# Altium PCB RP2040.PcbDoc
Units mm, origin at the board's own origin, x right, y up, seen from the top; angles counter-clockwise.
Board outline 50 x 50 mm, 2 copper layers (Top Layer, Bottom Layer), stack 1.569 mm thick; 33 components, 52 nets, 211 pads, 20 vias.
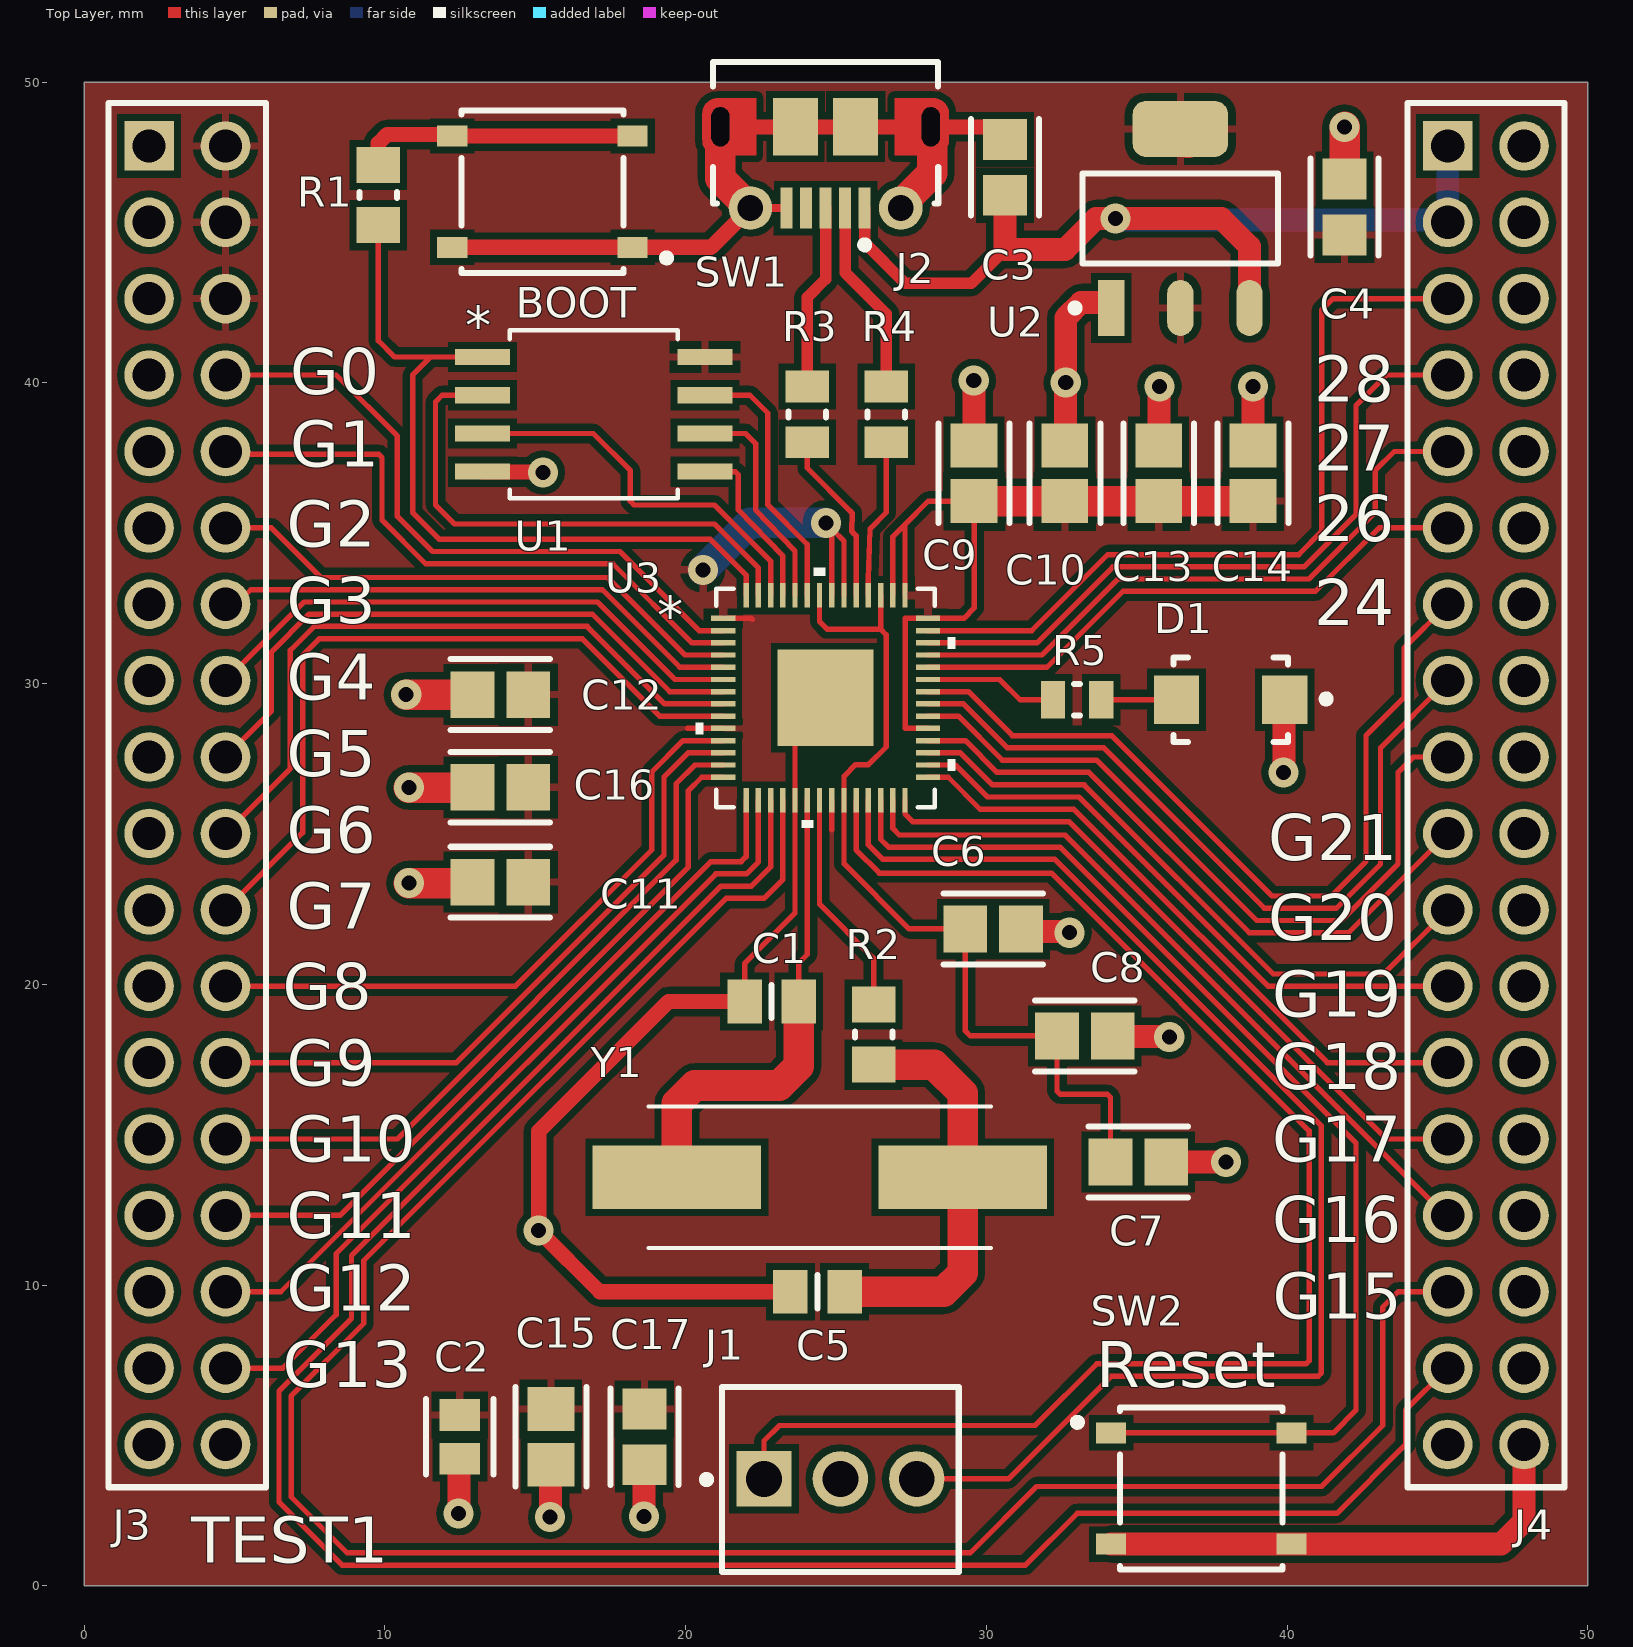
[diagram p0: Top Layer view]
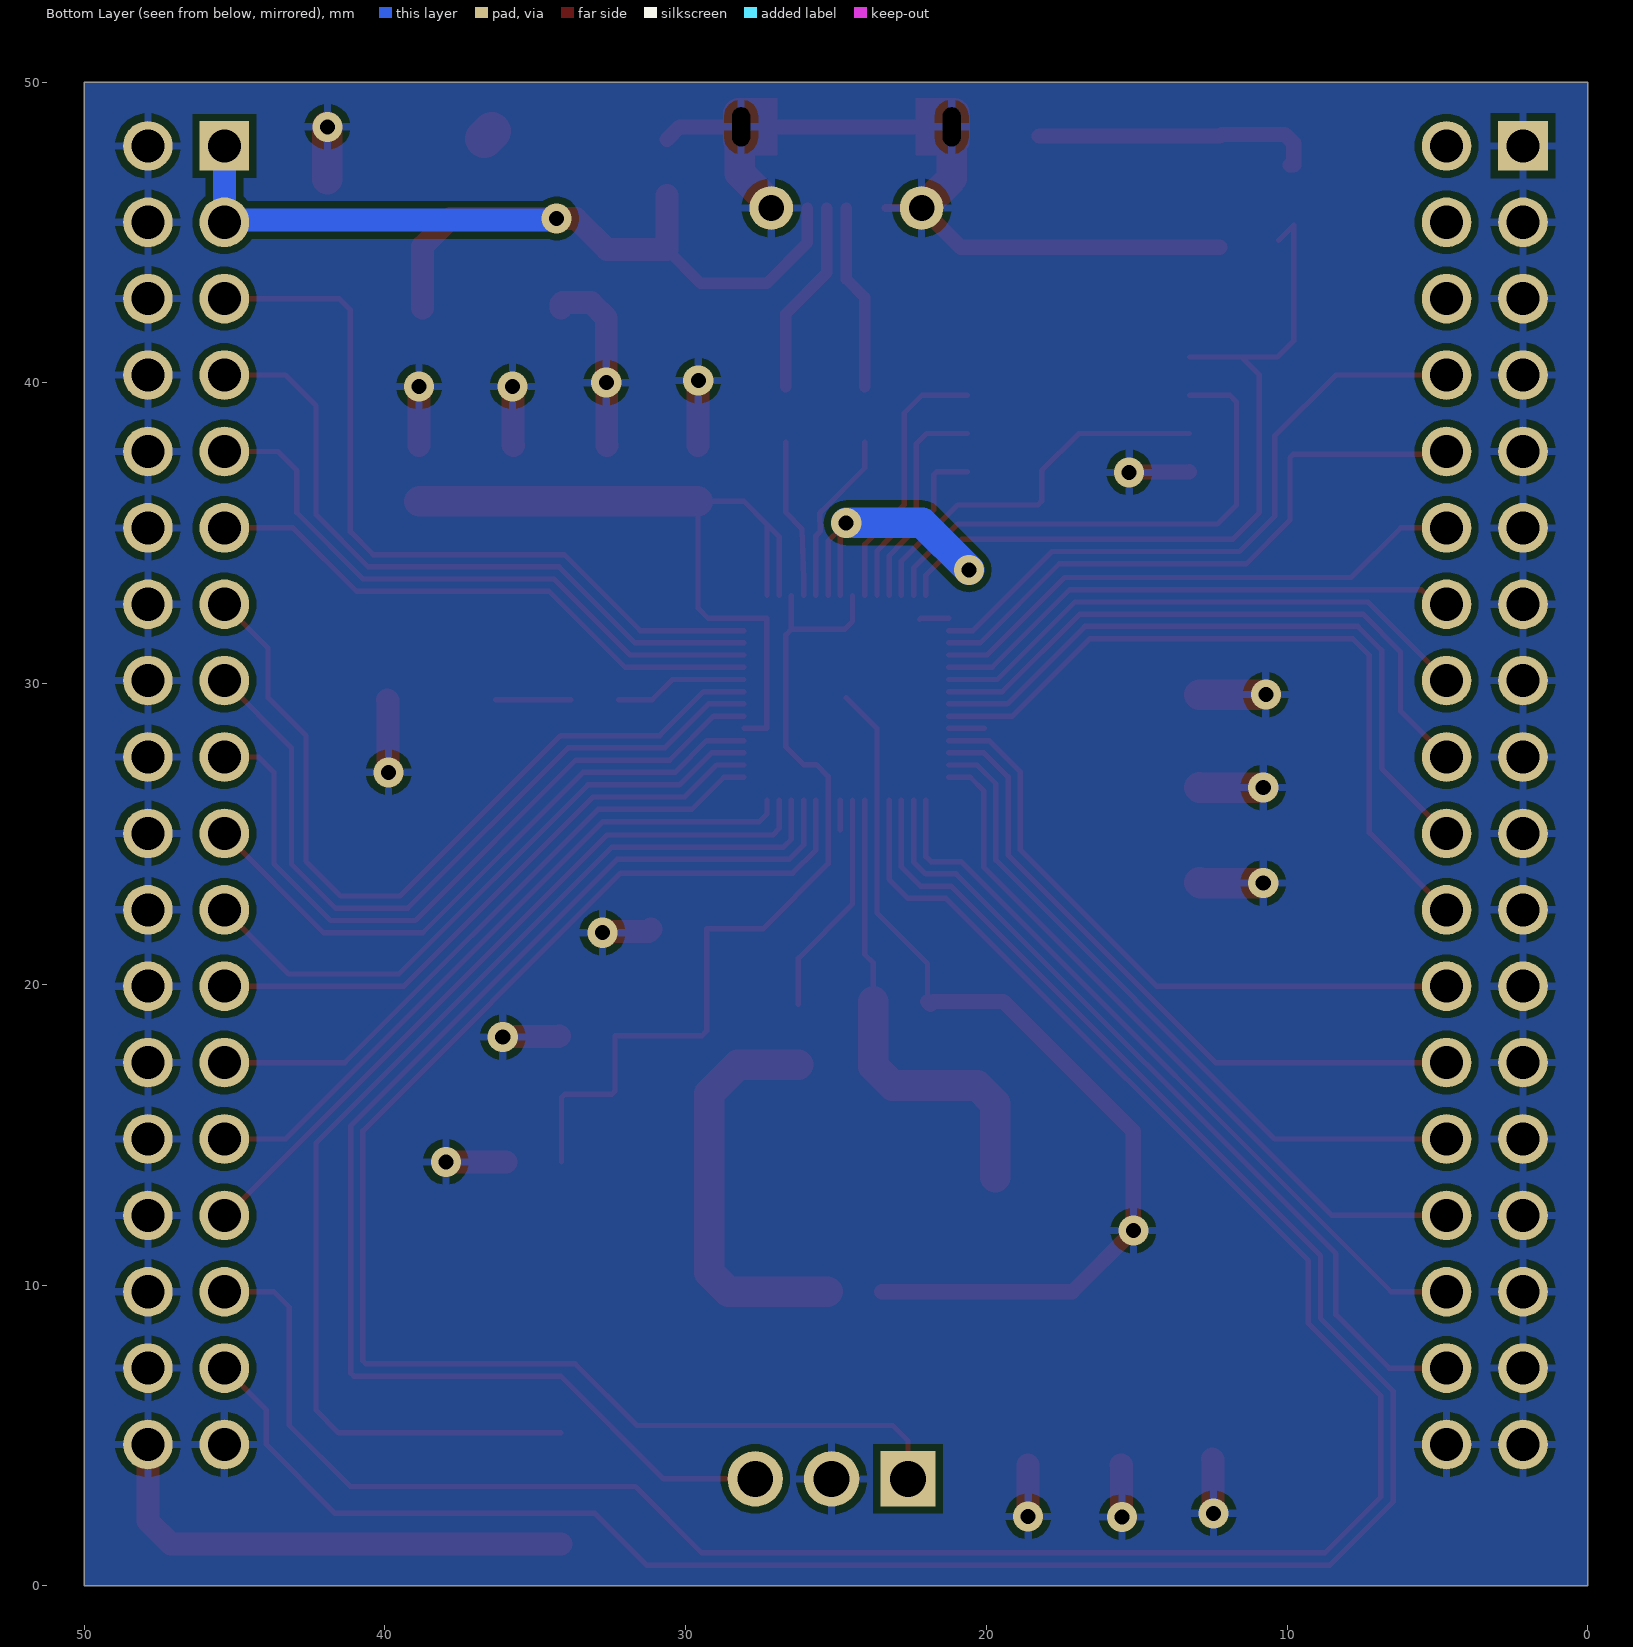
[diagram p1: Bottom Layer view, seen from below]
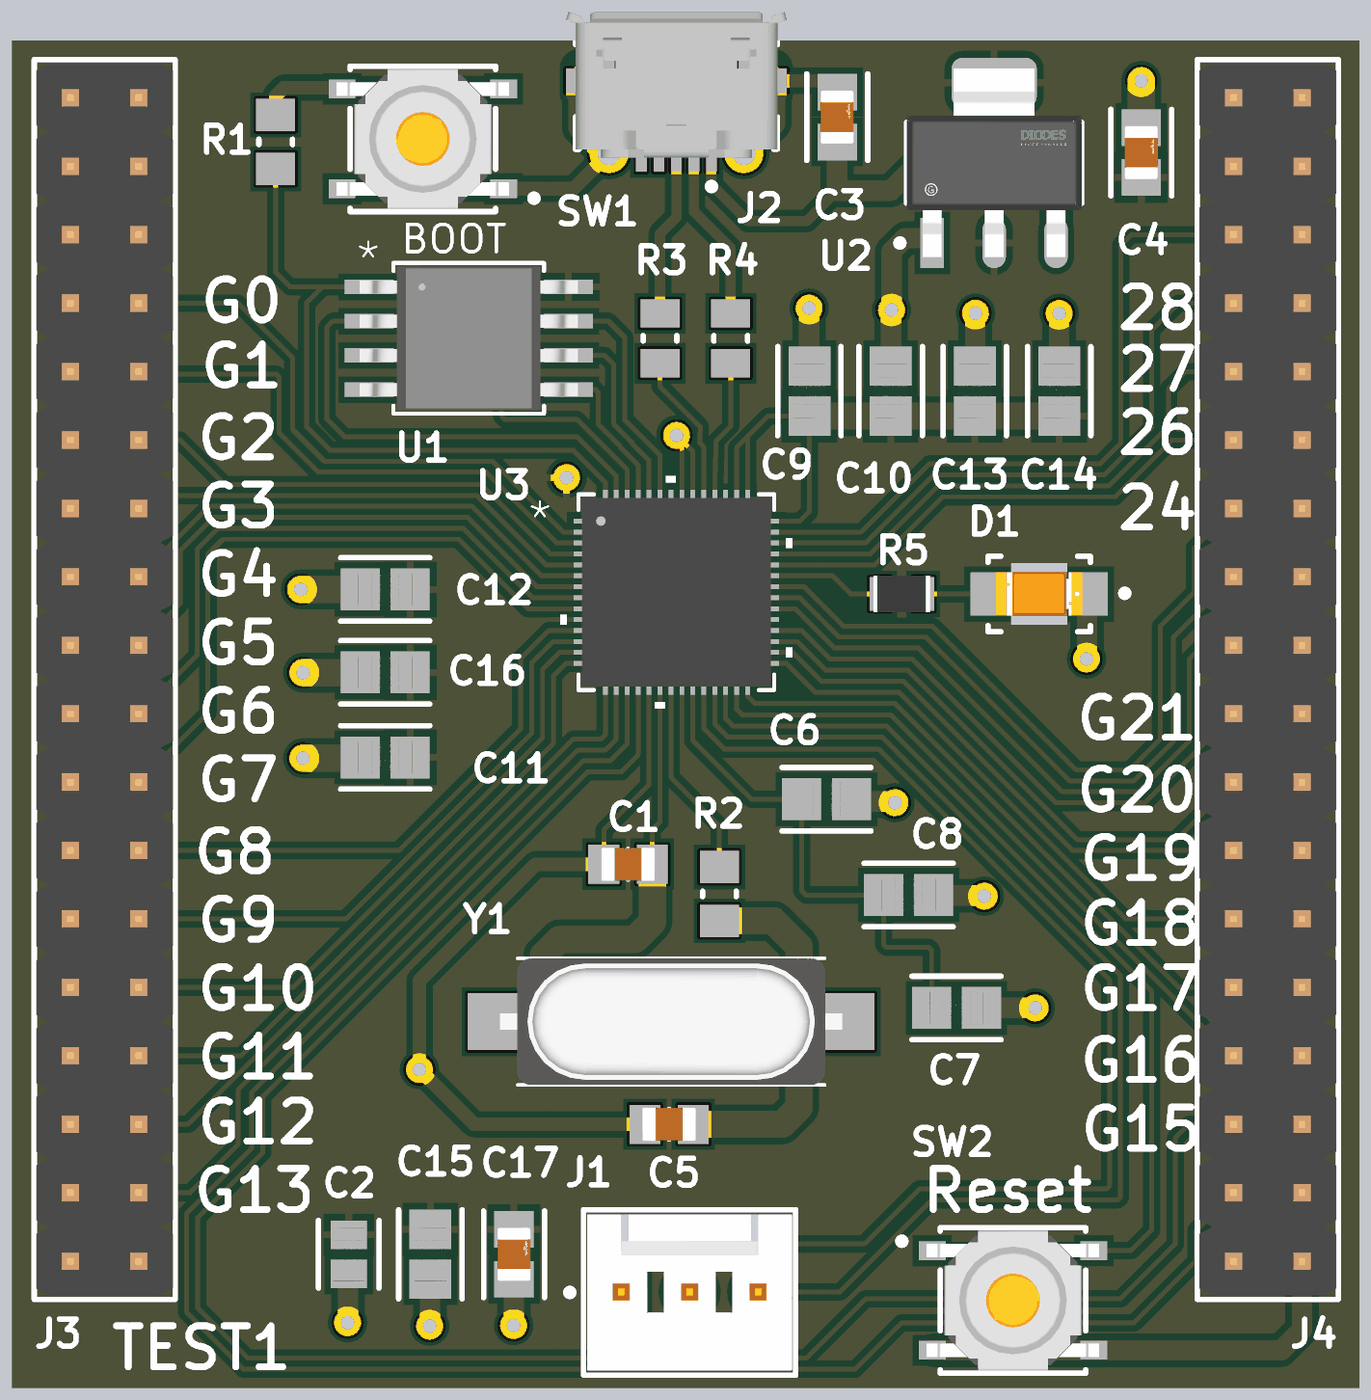
[diagram p2: 3D render of the assembled board from above, using the file's embedded part models]

## Layer stack, top to bottom
Top Solder: solder mask 0.0254, SM-001, Dk 4
Top Layer: signal copper 0.035
Dielectric 1: core 1.4986, Core-043, Dk 4.3
Bottom Layer: signal copper 0.035
Bottom Solder: solder mask 0.0254, SM-001, Dk 4

## Board outline
0,0 50,0 50,50 0,50

## Design rules (kind name [scope] priority, off if disabled: settings)
Clearance [All] p1: gap=0.229 ignorepadtopadclearanceinfootprint=FALSE
MinimumSolderMaskSliver [All] p1: minsoldermaskwidth=0.216
PolygonConnect [All] p1: connectstyle=Relief reliefconductorwidth=0.254 reliefentries=4 polygonreliefangle="90 Angle" airgapwidth=0.254
RoutingVias [All] p1: holewidth=0.3 width=0.6 viastyle="Through Hole" minholewidth=0.2 minwidth=0.2 maxholewidth=1.6 maxwidth=1.6
SilkToSolderMaskClearance [IsPad] p1: minsilkscreentomaskgap=0.178 clearancetoexposedcopper=TRUE
SolderMaskExpansion [All] p1: expansion=0.102 istentingtop=FALSE
Width [All] p1: maxlimit=2.54 minlimit=0.025 preferedwidth=0.254 minimp=50.000000 maximp=50.000000 favimp=50.000000
28 further rules are at their usual default settings.

## Components (designator, comment, footprint, x,y, rotation, side; value= is the part's Value field where it differs from the comment)
C1 "CL21C270JCANNNC" CAPC2012X140N 22.86,19.431 r180 top
C2 "CL21B104KBCNNNC" FP-CL21-IPC_C 12.49,4.953 r270 top
C3 "GRM21BR61C106KE15K" FP-GRM21B-0_1-IPC_A 30.623,47.164 r90 top
C4 "GRM21BR61C106KE15K" FP-GRM21B-0_1-IPC_A 41.91,45.847 r90 top
C5 "CL21C270JCANNNC" CAPC2012X140N 24.384,9.779 r180 top
C6 "CL21B105KOFNNNE" FP-CL21-IPC_A 30.226,21.844 r180 top
C7 "CL21B104KBCNNNC" FP-CL21-IPC_A 35.052,14.097 r0 top
C8 "CL21B104KBCNNNC" FP-CL21-IPC_A 33.274,18.288 r0 top
C9 "CL21B105KOFNNNE" FP-CL21-IPC_A 29.591,36.994 r270 top
C10 "CL21B104KBCNNNC" FP-CL21-IPC_A 32.608,36.994 r90 top
C11 "CL21B104KBCNNNC" FP-CL21-IPC_A 13.843,23.398 r180 top
C12 "CL21B104KBCNNNC" FP-CL21-IPC_A 13.843,29.633 r180 top
C13 "CL21B104KBCNNNC" FP-CL21-IPC_A 35.73,36.994 r90 top
C14 "CL21B104KBCNNNC" FP-CL21-IPC_A 38.862,36.994 r90 top
C15 "CL21B104KBCNNNC" FP-CL21-IPC_A 15.521,4.953 r270 top
C16 "CL21B104KBCNNNC" FP-CL21-IPC_A 13.843,26.554 r180 top
C17 "GRM21BR61C106KE15K" FP-GRM21B-0_1-IPC_A 18.626,4.953 r90 top
D1 "APTR3216SECK" FP-APTR3216SECK-MFG 38.122,29.464 r180 top
J1 "22-29-2031" FP-22-29-2031-MFG 25.146,3.536 r0 top
J2 "105017-0001" USB-MICRO-B_V 24.654,47.164 r180 top
J3 "61303621121" 61303621121 3.429,26.289 r270 top
J4 "61303621121" 61303621121 46.609,26.289 r270 top
R1 "RC0805JR-131KL" RESC2013X60X35ML10T20 9.779,46.244 r90 top value=1kR
R2 "RC0805JR-131KL" RESC2013X60X35ML10T20 26.251,18.331 r270 top
R3 "RK73H2ATTD27R4F" RESC2013X60X30NL20T20 24.044,38.953 r270 top value=27.4R
R4 "RK73H2ATTD27R4F" RESC2013X60X30NL20T20 26.67,38.953 r270 top value=27R4
R5 "RC0805FR-07470RL" RESC2013X60X35LL10T20 33.02,29.464 r0 top
SW1 "PTS526SK15SMTR2LFS" FP-PTS526SK15SMTR2LFS-MFG 15.24,46.355 r180 top
SW2 "PTS526SK15SMTR2LFS" FP-PTS526SK15SMTR2LFS-MFG 37.148,3.238 r0 top
U1 "W25Q128JVSIQ" W25Q128JVSIQ 16.944,38.953 r0 top
U2 "AZ1117IH-3.3TRG1" FP-SOT223-IPC_B 36.449,45.466 r90 top
U3 "RP2040" RP2040 24.654,29.528 r0 top
Y1 "ABLS-12.000MHz-20-B-3-H-T" XTAL_ABLS-12.000MHz-20-B-3-H-T 24.46,13.589 r180 top

## Footprints (in the part's own frame and the unit in brackets; to place one, negate y for a bottom-side part, rotate by r counter-clockwise, add the part's x,y. Pads: shape width x height; smd on the part's side, far side on the other; paste and mask are expansions set on the pad)
61303621121 [mm] "Pin Header, pitch 2.54 mm, THT, Vertical, dual row, 36p"
  rect 1.65x1.65 hole 1.1: 1(-21.59,-1.27)
  round 1.65 hole 1.1: 2(-21.59,1.27) 3(-19.05,-1.27) 4(-19.05,1.27) 5(-16.51,-1.27) 6(-16.51,1.27) 7(-13.97,-1.27) 8(-13.97,1.27) 9(-11.43,-1.27) 10(-11.43,1.27) 11(-8.89,-1.27) 12(-8.89,1.27) 13(-6.35,-1.27) 14(-6.35,1.27) 15(-3.81,-1.27) 16(-3.81,1.27) 17(-1.27,-1.27) 18(-1.27,1.27) 19(1.27,-1.27) 20(1.27,1.27) 21(3.81,-1.27) 22(3.81,1.27) 23(6.35,-1.27) 24(6.35,1.27) 25(8.89,-1.27) 26(8.89,1.27) 27(11.43,-1.27) 28(11.43,1.27) 29(13.97,-1.27) 30(13.97,1.27) 31(16.51,-1.27) 32(16.51,1.27) 33(19.05,-1.27) 34(19.05,1.27) 35(21.59,-1.27) 36(21.59,1.27)
  silkscreen extent -23.01,-2.62 23.01,2.62, body extent -22.86,-2.54 22.86,2.54, height 8.59
CAPC2012X140N [mm]
  rect 1.15x1.45 smd: 1(-0.9,0) 2(0.9,0)
  silkscreen extent 0,-0.55 0,0.55, body extent -1,-0.63 1,0.63, height 0.75
FP-22-29-2031-MFG [mm]
  rect 1.84x1.84 hole 1.19 paste-1000 mask+0: 1(-2.54,0.02)
  round 1.84 hole 1.19 paste-1000 mask+0: 2(0,0.02) 3(2.54,0.02)
  silkscreen extent -4.57,-3.08 3.94,3.08, body extent -4.04,-3.17 4.04,3.17, height 0.25
FP-APTR3216SECK-MFG [mm]
  rect 1.5x1.6 smd paste+0 mask+0: 1(-1.8,0) 2(1.8,0)
  silkscreen extent -3.3,-1.4 1.9,1.4, body extent -2.65,-1.15 2.65,1.15, height 0.25
FP-CL21-IPC_A [mm]
  rect 1.455x1.556 smd paste+0 mask+0: 1(-0.926,0) 2(0.926,0)
  silkscreen extent -1.65,-1.18 1.65,1.18, body extent -2.15,-1.28 2.15,1.28, height 0.25
FP-CL21-IPC_C [mm]
  rect 1.055x1.356 smd paste+0 mask+0: 1(-0.726,0) 2(0.726,0)
  silkscreen extent -1.25,-1.12 1.25,1.12, body extent -1.35,-0.82 1.35,0.82, height 0.25
FP-GRM21B-0_1-IPC_A [mm]
  rect 1.358x1.462 smd paste+0 mask+0: 1(-0.927,0) 2(0.927,0)
  silkscreen extent -1.61,-1.13 1.61,1.13, body extent -2.11,-1.23 2.11,1.23, height 0.25
FP-PTS526SK15SMTR2LFS-MFG [mm]
  rect 1x0.7 smd paste+0 mask+0: 1(-3,1.85) 2(3,1.85) 3(-3,-1.85) 4(3,-1.85)
  silkscreen extent -4.25,-2.7 2.7,2.7, body extent -3.6,-2.8 3.6,2.8, height 0.25
FP-SOT223-IPC_B [mm]
  rect 1.86x0.872 smd paste+0 mask+0: 1(-2.976,2.3)
  rrect100% 1.86x0.872 smd paste+0 mask+0: 2(-2.976,0) 3(-2.976,-2.3)
  rrect47% 1.86x3.172 smd paste+0 mask+0: 4(2.976,0)
  silkscreen extent -3.1,-3.25 1.5,3.62, body extent -4.16,-3.5 4.16,3.5, height 0.25
RESC2013X60X30NL20T20 [mm] "Chip Resistor, 2-Leads, Body 2.00x1.25mm, IPC Medium Density"
  rect 1.05x1.45 smd: 1(-0.925,0) 2(0.925,0)
  silkscreen extent -0.1,-0.63 0.1,0.63, body extent -1.1,-0.72 1.1,0.72, height 0.6
RESC2013X60X35LL10T20 [mm] "Chip Resistor, 2-Leads, Body 2.1x1.35mm, IPC High Density"
  rect 0.8x1.25 smd: 1(-0.8,0) 2(0.8,0)
  silkscreen extent -0.1,-0.53 0.1,0.53, body extent -1.05,-0.67 1.05,0.68, height 0.6
RESC2013X60X35ML10T20 [mm] "Chip Resistor, 2-Leads, Body 2.00x1.25mm, IPC Low Density"
  rect 1.2x1.45 smd: 1(-1,0) 2(1,0)
  silkscreen extent -0.1,-0.63 0.1,0.63, body extent -1.05,-0.67 1.05,0.67, height 0.6
RP2040 [mil] "RP2040"
  rect 32x7 smd paste+0 mask+0: 1(-134,104) 2(-134,88) 3(-134,72) 4(-134,56) 5(-134,40) 6(-134,24) 7(-134,8) 8(-134,-8) 9(-134,-24) 10(-134,-40) 11(-134,-56) 12(-134,-72) 13(-134,-88) 14(-134,-104) 29(134,-104) 30(134,-88) 31(134,-72) 32(134,-56) 33(134,-40) 34(134,-24) 35(134,-8) 36(134,8) 37(134,24) 38(134,40) 39(134,56) 40(134,72) 41(134,88) 42(134,104)
  rect 7x32 smd paste+0 mask+0: 15(-104,-134) 16(-88,-134) 17(-72,-134) 18(-56,-134) 19(-40,-134) 20(-24,-134) 21(-8,-134) 22(8,-134) 23(24,-134) 24(40,-134) 25(56,-134) 26(72,-134) 27(88,-134) 28(104,-134) 43(104,134) 44(88,134) 45(72,134) 46(56,134) 47(40,134) 48(24,134) 49(8,134) 50(-8,134) 51(-24,134) 52(-40,134) 53(-56,134) 54(-72,134) 55(-88,134) 56(-104,134)
  rect 126x126 smd paste-62.5 mask+0: 57(0,0)
  silkscreen extent -170,-170 170,170, body extent -138,-138 138,138, height 35
USB-MICRO-B_V [mm] "USB, MICRO B, Body 7.491x4.695 mm, Pitch 0.65 mm"
  rect 0.4x1.35 smd: 1(-1.3,1.35) 2(-0.65,1.35) 3(0,1.35) 4(0.65,1.35) 5(1.3,1.35)
  round 1.45 hole 0.85: 6(-2.5,1.35) 7(2.5,1.35)
  rrect50% 0x0 hole 0.6 slot 1.3 at 90 deg: 8(-3.5,-1.35) 11(3.5,-1.35)
  rect 1.5x1.9 smd: 9(-1,-1.35) 10(1,-1.35)
  Top Layer circle w0.5: c3.6,-1.8 r0.25
  Top Layer circle w0.5: c-3.6,-1.8 r0.25
  Top Layer region: -2.3,-2.3 -2.3,-0.4 -3.6,-0.4 -3.6,-2.3
  Top Layer region: 2.3,-0.4 2.3,-2.3 3.6,-2.3 3.6,-0.4
  Top Layer region: 3.6,-0.9 3.6,-1.8 4.1,-1.8 4.1,-0.9
  Top Layer region: -3.6,-1.8 -3.6,-0.9 -4.1,-0.9 -4.1,-1.8
  Top Layer lines w0.5: 3.572,-0.652 cw(c3.6,-0.9) 3.572,-1.148 cw(c3.6,-0.9) 3.503,-1.13 cw(c3.6,-0.9) 3.35,-0.9 cw(c3.6,-0.9) 3.503,-0.67 cw(c3.6,-0.9) 3.572,-0.652 ; -3.54,-0.657 cw(c-3.6,-0.9) -3.54,-1.143 cw(c-3.6,-0.9) -3.85,-0.9 cw(c-3.6,-0.9) -3.54,-0.657
  silkscreen extent -3.75,-3.5 3.75,2.7, body extent -4.1,-3.9 4.1,1.5, height 2.67
W25Q128JVSIQ [mil] "W25Q128JVSIQ"
  rect 72x21 smd paste+0 mask+0: 1(-145.5,75) 2(-145.5,25) 3(-145.5,-25) 4(-145.5,-75) 5(145.5,-75) 6(145.5,-25) 7(145.5,25) 8(145.5,75)
  silkscreen extent -110,-110 110,110, body extent -159,-105 159,105, height 85
XTAL_ABLS-12.000MHz-20-B-3-H-T [mm]
  rect 5.6x2.1 smd: 1(-4.75,0) 2(4.75,0)
  silkscreen extent -5.7,-2.35 5.7,2.35, body extent -6.35,-2.35 6.35,2.35, height 4.06

## Part data
C1 C5: "CL21 Series 27 pF 100 V ±5 % Tolerance C0G SMT Multilayer Ceramic Capacitor", Capacitance=27pF, Case Code (Imperial)=0805, Case Code (Metric)=2012, Dielectric=C0G, Manufacturer=Samsung, Max Operating Temperature=125°C, Min Operating Temperature=-55°C, Package=None, Package Quantity=1, Supplier Part Number 1=1276-2622-1-ND, Temperature Coefficient=300ppm/°C, Tolerance=5%, Voltage=100V, Availability=Unavailable, Case/Package=0805, Category="Ceramic Capacitors", ComponentLink1Description=https://datasheet.ciiva.com/25740/cl21c270jcannnc-25740793.pdf?src-supplier=Digi-Key, ComponentLink1URL=https://datasheet.ciiva.com/25740/cl21c270jcannnc-25740793.pdf?src-supplier=Digi-Key, Construction=Flat, Depth=1.25mm, Height=0.65mm, Lead Free="Lead Free", Length=2mm, Manufacturer Part Number=CL21C270JCANNNC, Mount="Surface Mount", MP=CL21C270JCANNNC, Packaging="Tape and Reel", Price=None, Pricing 1="1=0.10000, 10=0.05700, 50=0.03100, 100=0.02520, 500=0.01802, 1000=0.01417 (USD)", Radiation Hardening=No, RoHS=Yes, RoHS Compliant=Yes, Series=CL, Stock 1=133925, Supplier 1=Digi-Key, Thickness=0.03inch, Voltage Rating=100V, Voltage Rating (DC)=100V, Width=0.049inch
C2 C7 C8 C10 C11 C12 C13 C14 C15 C16: library part CMP-2000-05017-2, "CL21 Series 0805 100nF 50V ±10% Tolerance X7R Multilayer Ceramic Chip Capacitor", Capacitance=100nF, Case Code (Imperial)=0805, Case Code (Metric)=2012, Dielectric=X7R, Manufacturer=Samsung, Max Operating Temperature=125°C, Min Operating Temperature=-55°C, Supplier Part Number 1=1276-1003-1-ND, Tolerance=10%, Voltage=50V, Case/Package=0805, Category="Ceramic Capacitors", ComponentLink1Description=https://datasheet.ciiva.com/25710/cl21b104kbcnnnc-25710182.pdf?src-supplier=Digi-Key, ComponentLink1URL=https://datasheet.ciiva.com/25710/cl21b104kbcnnnc-25710182.pdf?src-supplier=Digi-Key, ComponentLink2Description=https://datasheet.ciiva.com/29199/454152-da-01-en-vs-kondensator-0805-29199814.pdf?src-supplier=Conrad, ComponentLink2URL=https://datasheet.ciiva.com/29199/454152-da-01-en-vs-kondensator-0805-29199814.pdf?src-supplier=Conrad, Construction=Flat, Contact Plating=Tin, Depth=1.25mm, Height=0.85mm, Lead Free="Lead Free", Length=2mm, Manufacturer Part Number=CL21B104KBCNNNC, Material=Ceramic, Mount="Surface Mount", Packaging="Tape and Reel", Pricing 1="1=0.10000, 10=0.04400, 50=0.02400, 100=0.01960, 500=0.01404, 1000=0.01103 (USD)", Radiation Hardening=No, RoHS=Yes, RoHS Compliant=Yes, Series=CL, Stock 1=3609597, Supplier 1=Digi-Key, Thickness=0.037inch, Voltage Rating=50V, Voltage Rating (DC)=50V, Width=0.049inch
C3 C4 C17: library part CMP-2007-03534-2, "Chip Multilayer Ceramic Capacitors for General Purpose, 0805, 10uF, X5R, 15%, 10%, 16V", Capacitance=10uF, Case Code (Imperial)=0805, Case Code (Metric)=2012, Dielectric=X5R, Manufacturer=Murata, Max Operating Temperature=85°C, Min Operating Temperature=-55°C, Package Quantity=10000, Supplier Part Number 1=490-6473-1-ND, Tolerance=10%, Voltage=16V, Case/Package=0805, Category="Ceramic Capacitors", ComponentLink1Description=https://datasheet.ciiva.com/26822/getdatasheetpartid-31687-26822939.pdf?src-supplier=Verical, ComponentLink1URL=https://datasheet.ciiva.com/26822/getdatasheetpartid-31687-26822939.pdf?src-supplier=Verical, ComponentLink2Description=https://datasheet.ciiva.com/6270/partnumbering-e-01-6270410.pdf?src-supplier=Digi-Key, ComponentLink2URL=https://datasheet.ciiva.com/6270/partnumbering-e-01-6270410.pdf?src-supplier=Digi-Key, ComponentLink3Description=https://datasheet.ciiva.com/6270/partnumbering-e-01-6270407.pdf?src-supplier=Digi-Key, ComponentLink3URL=https://datasheet.ciiva.com/6270/partnumbering-e-01-6270407.pdf?src-supplier=Digi-Key, ComponentLink4Description=https://datasheet.ciiva.com/6270/partnumbering-e-01-6270412.pdf?src-supplier=Digi-Key, ComponentLink4URL=https://datasheet.ciiva.com/6270/partnumbering-e-01-6270412.pdf?src-supplier=Digi-Key, ComponentLink5Description=https://datasheet.ciiva.com/5414/product-5414934.pdf?src-supplier=Mouser, ComponentLink5URL=https://datasheet.ciiva.com/5414/product-5414934.pdf?src-supplier=Mouser, Construction=Flat, Depth=1.25mm, Height=1.25mm, Length=2mm, Manufacturer Part Number=GRM21BR61C106KE15K, Mount="Surface Mount", Packaging="Tape and Reel", Pricing 1="1=0.18000, 10=0.13100, 50=0.07420, 100=0.06150, 500=0.04312, 1000=0.03570, 2500=0.03323, 5000=0.03040 (USD)", Radiation Hardening=No, REACH SVHC="No SVHC", Reach SVHC Compliant=Yes, RoHS=Yes, RoHS Compliant=Yes, Series=GRM, Supplier 1=Digi-Key, Termination=SMD/SMT, Thickness=0.053inch, Voltage Rating=16V, Voltage Rating (DC)=16V, Width=0.049inch
  C3 C4: Stock 1=2364831
  C17: Stock 1=2364631
C6 C9: library part CMP-13271-003098-1, "CL21 Series 0805 1uF 16V ±10% Tolerance X7R Multilayer Ceramic Chip Capacitor", Capacitance=1uF, Case Code (Imperial)=0805, Case Code (Metric)=2012, Dielectric=X7R, Manufacturer=Samsung, Max Operating Temperature=125°C, Min Operating Temperature=-55°C, Package Quantity=1, Supplier Part Number 1=1276-1026-1-ND, Tolerance=10%, Voltage=16V, Case/Package=0805, Category="Ceramic Capacitors", ComponentLink1Description=https://datasheet.ciiva.com/25800/cl21b105kofnnne-25800257.pdf?src-supplier=Digi-Key, ComponentLink1URL=https://datasheet.ciiva.com/25800/cl21b105kofnnne-25800257.pdf?src-supplier=Digi-Key, ComponentLink2Description=https://datasheet.ciiva.com/26838/getdatasheetpartid-358361-26838673.pdf?src-supplier=Verical, ComponentLink2URL=https://datasheet.ciiva.com/26838/getdatasheetpartid-358361-26838673.pdf?src-supplier=Verical, ComponentLink3Description=https://datasheet.ciiva.com/26310/mlcc-catalogdownload2013-eng-26310166.pdf?src-supplier=Distrelec, ComponentLink3URL=https://datasheet.ciiva.com/26310/mlcc-catalogdownload2013-eng-26310166.pdf?src-supplier=Distrelec, Construction=Flat, Contact Plating=Tin, Depth=1.25mm, Height=1.25mm, Lead Free="Lead Free", Length=2mm, Manufacturer Part Number=CL21B105KOFNNNE, Mount="Surface Mount", Packaging="Tape and Reel", Pricing 1="1=0.10000, 10=0.05100, 50=0.02800, 100=0.02290, 500=0.01636, 1000=0.01286 (USD)", Radiation Hardening=No, RoHS=Yes, RoHS Compliant=Yes, Series=CL, Stock 1=664825, Supplier 1=Digi-Key, Thickness=0.053inch, Voltage Rating=16V, Voltage Rating (DC)=16V, Width=0.049inch
D1: library part CMP-44529-000069-1, "LED ORANGE CLEAR CHIP SMD", Case Code (Imperial)=1206, Case Code (Metric)=3216, Color=Orange, Forward Current=20mA, Forward Voltage=2.1V, Lens Color=Clear, Manufacturer=Kingbright, Max Operating Temperature=85°C, Min Operating Temperature=-40°C, Package Quantity=2000, Power Rating=75mW, Supplier Part Number 1=754-1170-2-ND, Case/Package=1206, Category=LEDs, ComponentLink1Description=https://datasheet.ciiva.com/2120/aptr3216seck-2120882.pdf?src-supplier=Digi-Key, ComponentLink1URL=https://datasheet.ciiva.com/2120/aptr3216seck-2120882.pdf?src-supplier=Digi-Key, ComponentLink2Description=https://datasheet.ciiva.com/12400/aptr3216seck-39406-12400858.pdf?src-supplier=Mouser, ComponentLink2URL=https://datasheet.ciiva.com/12400/aptr3216seck-39406-12400858.pdf?src-supplier=Mouser, ComponentLink3Description=https://datasheet.ciiva.com/2120/aptr3216seck-2120883.pdf?src-supplier=Digi-Key, ComponentLink3URL=https://datasheet.ciiva.com/2120/aptr3216seck-2120883.pdf?src-supplier=Digi-Key, ComponentLink4Description=https://datasheet.ciiva.com/2120/aptr3216seck-2120884.pdf?src-supplier=Digi-Key, ComponentLink4URL=https://datasheet.ciiva.com/2120/aptr3216seck-2120884.pdf?src-supplier=Digi-Key, ComponentLink5Description=https://datasheet.ciiva.com/14604/70062889-14604443.pdf?src-supplier=Allied+Electronics, ComponentLink5URL=https://datasheet.ciiva.com/14604/70062889-14604443.pdf?src-supplier=Allied+Electronics, Dominant Wavelength=601nm, Height=1.05mm, Illumination Color=Orange, Lead Free="Lead Free", Length=3.2mm, Lens Style=Clear, Luminous Intensity=240mcd, Manufacturer Part Number=APTR3216SECK, Mount="Surface Mount", Number of LEDs=1, Number of Pins=2, Packaging="Tape and Reel", Pricing 1="2000=0.07000, 6000=0.06300, 10000=0.05600, 50000=0.04725, 100000=0.04550 (USD)", RoHS=Yes, RoHS Compliant=Yes, Series=APTR, Stock 1=4000, Supplier 1=Digi-Key, Test Current=20mA, Viewing Angle=120°, Wavelength=601nm, Width=1.6mm
J1: library part CMP-04776-000327-1, "CONN HEADER VERT 3POS 2.54MM", Color=Natural, Contact Resistance=10mR, Current Rating=4A, Housing Color=White, Max Operating Temperature=75°C, Min Operating Temperature=0°C, Voltage Rating=250V, Connector Type="Male Pin", Contact Material=Brass, Contact Mating Length=0.295inch, Contact Plating=Gold, Contact Type="Male Pin", Depth=5.8mm, Fastening Type=Friction, Gender=Male, Housing Material=Nylon, Lead Pitch=2.54mm, Length=7.62mm, Mount="Through Hole", Number of Contacts=3, Number of Positions=3, Number of Rows=1, Orientation=Straight, Packaging=Bulk, Pitch=2.54mm, Radiation Hardening=No, RoHS Compliant=Yes, Series="KK® 6410", Termination=Solder, Working Voltage=250V
J2: library part CMP-2000-05827-1, "Micro-USB B Receptacle, Right Angle, Bottom Mount, Surface Mount, with Solder Tabs, -30 to 85 degC, 5-Pin USB, RoHS, Tape and Reel", Current Rating=1.8A, Flammability Rating="UL94 V-0", Insulation Color=Black, Manufacturer=Molex, Manufacturer Part Number=1050170001, Max Operating Temperature=85°C, Max Voltage Rating (AC)=30V, Min Operating Temperature=-30°C, Package Description="5-Leads USB, Micro B, Body 7.5 x 5 mm, Pitch 0.65 mm", Package Quantity=2000, Package Reference=MICRO-B, Package Version="Rev. F, 12/2012", Standard Package=1, Supplier Part Number 1=WM1399CT-ND, 3D Model=105017-0001.stp, Catalog Drawings=1050170001, Category=Connectors,Interconnects, Circuits=5, Connector Type=USB-microB, Contact Material="Copper Alloy,Copper", Contact Plating=Gold, Datasheet URL=http://www.molex.com/elqNow/elqRedir.htm?ref=http://www.molex.com/webdocs/datasheets/pdf/en-us/1050170001_IO_CONNECTORS.pdf, Datasheet Version=03/2016, Depth=7.5mm, Family=USB,DVI,HDMIConnectors, Featured Product=Micro-USBConnectorsUSBConnectors, Features=Shielded,SolderRetention, Gender=Receptacle, Halogen Free="Low Halogen", Housing Material=Polymer, Ingress Protection=-, Length=8.2mm, Manufacturer URL=http://www.molex.com/, Mating Cycles=10000, Mating Products=WM17145-ND-CABLEMICROUSBBTOSTDA1.0MWM17147-ND-CABLEMICROUSBBTOSTDA2.0MWM17146-ND-CABLEMICROUSBBTOSTDA1.5M, Mount="Surface Mount", Mounting Technology=SurfaceMount, Mounting Type=BoardCutout,SurfaceMount,RightAngle, Number of Circuits=5, Number of Contacts=5, Number of Ports=1, Number of Positions=5, Number of Terminals/Pins=5, Online Catalog=Molex-MicroUSB, Orientation="Right Angle", Other Names=WM1399DKR, Package URL=http://www.molex.com/pdm_docs/sd/1050170001_sd.pdf, Packaging=Digi-Reel®, PCN Assembly/Origin=ResinSupplier21/Oct/2015, Pitch=0.65mm, Pricing 1="1=1.01000, 10=0.84000, 100=0.69990, 1000=0.55994 (USD)", Radiation Hardening=No, RoHS=Yes, RoHS Compliant=Yes, RoHS Information=1050170001CertofCompliance, Series=-, Shielding=Shielded, Specifications=-, Stock 1=51039, Supplier 1=Digi-Key, Termination=Solder, USB Standard="USB 2.0", Voltage - Max=30V, Voltage Rating=30V, Voltage Rating (AC)=30V
J3 J4: library part CMP-1502-01131-1, "THT Vertical Pin Header WR-PHD, Pitch 2.54 mm, Dual Row, 36 pins", Color=Black, Contact Resistance=20mOhm, Flammability Rating="UL94 V-0", Manufacturer="Wurth Elektronik", Max Operating Temperature=105°C, Min Operating Temperature=-40°C, Operating Temperature=-40to105degC, Rated Current=3A, Supplier Part Number 1=732-5309-ND, Voltage Rating=250V, Withstanding Voltage=500VAC, Working Voltage=250VAC, Category=Connectors, ComponentLink1Description=http://www.farnell.com/datasheets/1442180.pdf?src-supplier=Farnell, ComponentLink1URL=http://www.farnell.com/datasheets/1442180.pdf?src-supplier=Farnell, ComponentLink2Description=http://www.farnell.com/datasheets/1442180.pdf?src-supplier=Newark, ComponentLink2URL=http://www.farnell.com/datasheets/1442180.pdf?src-supplier=Newark, ComponentLink3Description=http://www.farnell.com/datasheets/1442180.pdf?src-supplier=Element14, ComponentLink3URL=http://www.farnell.com/datasheets/1442180.pdf?src-supplier=Element14, ComponentLink4Description=https://katalog.we-online.de/em/datasheet/6130xx21121.pdf?src-supplier=Digi-Key, ComponentLink4URL=https://katalog.we-online.de/em/datasheet/6130xx21121.pdf?src-supplier=Digi-Key, Connector Type=Header, Contact Finish - Mating=GOLD, Contact Material="Copper Alloy,Copper", Contact Mating Length=0.236inch, Contact Plating=Gold, Contact Shape=Square, Contact Type="Male Pin", Datasheet URL=https://katalog.we-online.de/em/datasheet/6130xx21121.pdf, Fastening Type=Pull, Gender=Male, Insulation Color=Black, Insulation Material=Nylon, Manufacturer Part Number=61303621121, Manufacturer URL=http://www.we-online.de, Mount="Through Hole", Mounting Technology=THT, Number of Contacts=36, Number of Positions=36, Number of Rows=2, Orientation=Vertical, Package Reference=61303621121, Packaging=Bag, Part Number=61303621121, Pin Number=36, Pitch=2.54mm, Pricing 1="1=1.84000, 10=1.55900, 25=1.30000, 50=1.08400, 100=0.98500, 500=0.89500 (USD)", Publisher=WurthElektronik, RoHS=Yes, RoHS Compliant=Yes, Row Number=Dual, Row Spacing=0.1inch, Series=WR-PHD, Stock 1=1395, Supplier 1=Digi-Key, Termination=Solder
R1 R2: library part CMP-2001-01418-1, Case Code (Imperial)=0805, Case Code (Metric)=2012, Manufacturer=Yageo, Max Operating Temperature=155°C, Min Operating Temperature=-55°C, Power Rating=125mW, Resistance=1k, Resistance Tolerance=5%, Resistor Type="Thick Film", Supplier Part Number 1=13-RC0805JR-131KLCT-ND, Temperature Coefficient=100ppm/°C, Voltage Rating=150V, Case/Package=0805, Category="Chip SMD Resistors", ComponentLink1Description=https://datasheet.ciiva.com/12560/rc0805-257173-12560870.pdf?src-supplier=Mouser, ComponentLink1URL=https://datasheet.ciiva.com/12560/rc0805-257173-12560870.pdf?src-supplier=Mouser, ComponentLink2Description=https://datasheet.ciiva.com/17333/rc0805-17333917.pdf?src-supplier=Future+Electronics, ComponentLink2URL=https://datasheet.ciiva.com/17333/rc0805-17333917.pdf?src-supplier=Future+Electronics, ComponentLink3Description=https://datasheet.ciiva.com/7983/444164-7983797.pdf?src-supplier=Element14, ComponentLink3URL=https://datasheet.ciiva.com/7983/444164-7983797.pdf?src-supplier=Element14, Construction=Rectangular, Contact Plating=Tin,Lead, Depth=1.25mm, Height=0.5mm, Lead Free="Lead Free", Length=2mm, Manufacturer Part Number=RC0805JR-131KL, Military Standard=Not, Number of Pins=2, Packaging="Tape and Reel", Part Number=RC0805JR-131KL, Pricing 1="1=0.10000, 10=0.02800, 100=0.01150, 1000=0.00517, 2500=0.00448, 5000=0.00370 (USD)", Radiation Hardening=No, Reach SVHC Compliant=Yes, RoHS=Yes, RoHS Compliant=Yes, Series=RC, Size Code=0805, Supplier 1=Digi-Key, Termination=SMD/SMT, Tolerance=5%, Voltage Rating (DC)=150V, Width=1.25mm
  R1: Pins=2, Stock 1=180007
  R2: Stock 1=181610
R3 R4: library part CMP-2001-02274-1, "Res Thick Film 0805 27.4 Ohm 1% 0.25W(1/4W) ±100ppm/C Pad SMD Automotive T/R", Case Code (Imperial)=0805, Case Code (Metric)=2012, Manufacturer="KOA Speer", Max Operating Temperature=155°C, Min Operating Temperature=-55°C, Package Quantity=5000, Power Rating=125mW, Resistance=27R4, Resistor Type="Thick Film", Supplier Part Number 1=2019-RK73H2ATTD27R4FCT-ND, Temperature Coefficient=100ppm/°C, Tolerance=1%, Voltage Rating=150V, Case/Package=0805, Category="Chip SMD Resistors", ComponentLink1Description=https://datasheet.ciiva.com/5554/rk73h-5554015.pdf?src-supplier=Mouser, ComponentLink1URL=https://datasheet.ciiva.com/5554/rk73h-5554015.pdf?src-supplier=Mouser, Construction=Rectangular, Depth=1.25mm, Height=0.5mm, Length=2mm, Manufacturer Part Number=RK73H2ATTD27R4F, Military Standard=Not, Packaging="Tape and Reel", Part Number=RK73H2ATTD27R4F, Pricing 1="1=0.10000, 10=0.03900, 100=0.01610, 1000=0.00721, 2500=0.00626 (USD)", RoHS=Yes, RoHS Compliant=Yes, Series=RK73H, Stock 1=40520, Supplier 1=Digi-Key, Termination=SMD/SMT, Voltage Rating (DC)=150V, Width=1.25mm
R5: library part CMP-2000-06961-1, "Chip Resistor, 470 Ohm, +/- 1%, 125 mW, -55 to 155 degC, 0805 (2012 Metric), RoHS, Tape and Reel", Case Code (Imperial)=0805, Case Code (Metric)=2012, Manufacturer=Yageo, Max Operating Temperature=155°C, Max Power Dissipation=125mW, Min Operating Temperature=-55°C, Package Description="2-Pin Surface Mounted Device, Body 2 x 1.25 mm", Package Quantity=5000, Power Rating=250mW, Resistance=470R, Resistance Tolerance=±1%, Resistor Case Style=0805[2012Metric], Resistor Element Type=ThickFilm, Resistor Type="Thick Film", Supplier Part Number 1=311-470CRCT-ND, Temperature Coefficient=±100ppm/°C, Tolerance=1%, Voltage Rating=150V, Automotive Qualification Standard=-, Case/Package=0805, Category="Chip SMD Resistors", ComponentLink1Description=https://datasheet.ciiva.com/46447/444164-46447580.pdf?src-supplier=Element14, ComponentLink1URL=https://datasheet.ciiva.com/46447/444164-46447580.pdf?src-supplier=Element14, ComponentLink2Description=https://datasheet.ciiva.com/2457/pyu-r-int-thick-7-2457057.pdf?src-supplier=Digi-Key, ComponentLink2URL=https://datasheet.ciiva.com/2457/pyu-r-int-thick-7-2457057.pdf?src-supplier=Digi-Key, ComponentLink3Description=https://datasheet.ciiva.com/2457/pyu-r-int-thick-7-2457058.pdf?src-supplier=Digi-Key, ComponentLink3URL=https://datasheet.ciiva.com/2457/pyu-r-int-thick-7-2457058.pdf?src-supplier=Digi-Key, ComponentLink4Description=https://datasheet.ciiva.com/2457/pyu-r-int-thick-7-2457056.pdf?src-supplier=Digi-Key, ComponentLink4URL=https://datasheet.ciiva.com/2457/pyu-r-int-thick-7-2457056.pdf?src-supplier=Digi-Key, ComponentLink5Description=https://datasheet.ciiva.com/7941/444164-7941798.pdf?src-supplier=Element14, ComponentLink5URL=https://datasheet.ciiva.com/7941/444164-7941798.pdf?src-supplier=Element14, ComponentLink6Description=https://datasheet.ciiva.com/7941/444164-7941797.pdf?src-supplier=Element14, ComponentLink6URL=https://datasheet.ciiva.com/7941/444164-7941797.pdf?src-supplier=Element14, ComponentLink7Description=https://datasheet.ciiva.com/16745/rc0805-16745229.pdf?src-supplier=Future+Electronics, ComponentLink7URL=https://datasheet.ciiva.com/16745/rc0805-16745229.pdf?src-supplier=Future+Electronics, Construction=Rectangular, Datasheet URL=http://www.yageo.com/documents/recent/PYu-RC_Group_51_RoHS_L_7.pdf, Datasheet Version="Rev. 7, 05/2017", Depth=1.25mm, Features="Moisture Resistant", Height=0.5mm, Lead Free="Lead Free", Lead Pitch=0.4mm, Length=2mm, Manufacturer Part Number=RC0805FR-07470RL, Manufacturer URL=http://www.yageo.com/, Military Standard=Not, Mounting Technology=SurfaceMount, MSL=MSL1-Unlimited, Number of Pins=2, Number of Terminations=2, Package Reference=0805, Packaging=Tape&Reel, Pricing 1="1=0.10000, 10=0.03300, 100=0.01330, 1000=0.00600, 2500=0.00520 (USD)", Product Range=-, RoHS=Yes, RoHS Compliant=Yes, Series=RC, Size Code=0805, Stock 1=1517047, Supplier 1=Digi-Key, SVHC=ToBeAdvised, Termination=SMD/SMT, Voltage Rating (DC)=150V, Width=1.25mm
SW1 SW2: library part CMP-10040-000013-1, "TACT 5.2 X 5.2, 1.5 MM H, 260GF,", Contact Current Rating=50mA, Contact Resistance=100mΩ, Manufacturer=C&K, Operating Force=250gf, Supplier Part Number 1=CKN12221-1-ND, Temperature="-20°C to +70°C", Temperature Range High=+70°C, Temperature Range Low=-20°C, Voltage Rating Dc=12V, Automotive=No, Category=Switch, ComponentLink2Description=Datasheet, ComponentLink2URL=https://www.ckswitches.com/media/2780/pts526.pdf, Device Class L1=Electromechanical, Device Class L2=Switches, Device Class L3="Tactile Switches", Digikey Description="TACT 5.2 X 5.2, 1.5 MM H, 260GF,", Electromechanical Life=200000Cycles, Height=1.65mm, Lead Free=Yes, Manufacturer Part Number=PTS526SK15SMTR2LFS, Octopart=https://octopart.com/pts526+sk15+smtr2+lfs-c%26k+components-100617999, Package=PTS526SK15SMTR2LFS, Pricing 1="1=0.12000, 10=0.12000, 25=0.11400, 100=0.10350, 250=0.09732, 500=0.08904, 1000=0.07454 (USD)", RoHS=TRUE, Standoff Height=0mm, Stock 1=566829, Supplier 1=Digi-Key, Throw Configuration=SPST-NO
U1: "NOR Flash Serial (SPI, Dual SPI, Quad SPI) 3.3V 128M-bit 16M x 8 6ns 8-Pin SOIC Tube", Case/Package=SOIC, Frequency=104MHz, Manufacturer=Winbond, Max Operating Temperature=85°C, Min Operating Temperature=-40°C, Supplier Part Number 1=W25Q128JVSIQ-ND, Category=Flash, ComponentLink1Description=http://www.winbond.com/resource-files/w25q128jv%20revf%2003272018%20plus.pdf?src-supplier=Digi-Key, ComponentLink1URL=http://www.winbond.com/resource-files/w25q128jv%20revf%2003272018%20plus.pdf?src-supplier=Digi-Key, Copyright="Copyright (C) 2022 Ultra Librarian. All rights reserved.", Interface=SPI,Serial, Manufacturer Part Number=W25Q128JVSIQ, Manufacturer_Part_Number=W25Q128JVSIQ, Memory Format=FLASH,NOR, Mfr_Name=Winbond, Packaging=Tray, Pricing 1="1=1.76000, 10=1.60800, 25=1.56440, 50=1.55640, 100=1.39130, 250=1.38724, 500=1.36630, 1000=1.30829, 5000=1.21807 (USD)", RefDes=RefDes, RoHS=Yes, RoHS Compliant=Yes, Stock 1=162424, Supplier 1=Digi-Key, Type=DEV
U2: library part CMP-12756-000043-1, "IC REG LINEAR 3.3V 1A SOT223", Case/Package=TO-261-4, Dropout Voltage=1.2V, Manufacturer=Diodes, Max Operating Temperature=125°C, Min Current Limit=1A, Min Operating Temperature=-40°C, Output Current=800mA, Output Voltage=3.3V, Supplier Part Number 1=AZ1117IH-3.3TRG1DICT-ND, Category="Voltage Regulators - Linear", ComponentLink1Description=https://www.diodes.com/assets/Datasheets/AZ1117I.pdf?src-supplier=Digi-Key, ComponentLink1URL=https://www.diodes.com/assets/Datasheets/AZ1117I.pdf?src-supplier=Digi-Key, Manufacturer Part Number=AZ1117IH-3.3TRG1, Mount="Surface Mount", Mounting Technology="Surface Mount", Number of Pins=3, Number of Regulators=1, Packaging="Tape and Reel", Pins=3, Pricing 1="1=0.40000, 10=0.32100, 25=0.29360, 100=0.21840, 250=0.19796, 500=0.16384, 1000=0.12288 (USD)", RoHS=Yes, RoHS Compliant=Yes, Stock 1=174531, Supplier 1=Digi-Key
U3: "ARM® Cortex®-M0+ - Microcontroller IC 32-Bit Dual-Core 133MHz External Program Memory 56-QFN (7x7)", Manufacturer="Raspberry Pi", Manufacturer Part Number=SC0914(13), Supplier Part Number 1=2648-SC0914(13)CT-ND, Category=Uncategorized, Pricing 1="1=1.00000 (USD)", RoHS=No, Stock 1=117672, Supplier 1=Digi-Key
Y1: "Crystal 12MHz ±25ppm (Tol) ±35ppm (Stability) 20pF FUND 50Ohm 2-Pin HC-49/US SMD T/R", Manufacturer=Abracon, Manufacturer Part Number=ABLS-12.000MHZ-20-B-3-H-T, Package=None, Supplier Part Number 1=535-15006-1-ND, Category=Crystals, Check_prices=https://www.snapeda.com/parts/ABLS-12.000MHZ-20-B-3-H-T/Abracon+LLC/view-part/?ref=eda, ComponentLink1Description=https://abracon.com/Resonators/abls.pdf?src-supplier=Digi-Key, ComponentLink1URL=https://abracon.com/Resonators/abls.pdf?src-supplier=Digi-Key, Digi-Key_Part_Number=535-15006-2-ND, MF="Abracon LLC", MP=ABLS-12.000MHZ-20-B-3-H-T, Pricing 1="1=0.16000, 10=0.13500, 50=0.12180, 100=0.10830, 500=0.10288 (USD)", Purchase-URL=https://pricing.snapeda.com/search/part/ABLS-12.000MHZ-20-B-3-H-T/?ref=eda, RoHS=Yes, SnapEDA_Link=https://www.snapeda.com/parts/ABLS-12.000MHZ-20-B-3-H-T/Abracon+LLC/view-part/?ref=snap, Stock 1=7126, Supplier 1=Digi-Key

## Via types
v1: diameter 1, hole 0.5, Top Layer to Bottom Layer, 20 vias

## Nets (pads, with @x,y where several pads share a name; then routed paths per layer and width w, separated by ;. In a path a pad name is that pad's centre, name@x,y a point inside that pad or via, vN(x,y) a via of type N, cw(c..) or ccw(c..) an arc to the next point about the centre after c; other vN are vias at no path point)
ADC_AVDD: C2.1 C4.1 C9.2 C10.1 C11.1 C12.1 C13.1 C14.1 C15.1 C16.1 C17.2 J3.2 J3.4 J3.6 U1.8 U2.2 U2.4 U3.1 U3.10 U3.22 U3.33 U3.42 U3.43 U3.44 U3.48 U3.49 | length 40.3
  Top Layer w0.178: 20.066,28.512 U3.10 ; U3.1 22.186,32.17 22.225,32.131 ; v1(24.66,35.347) v1@24.857,35.15 ; 24.857,25.146 U3.22 ; U3.49 24.857,34.928 24.818,34.967 24.818,35.11 v1@24.857,35.15 ; U3.48 25.264,34.744 v1@24.857,35.15 ; U3.44 26.889,34.89 27.296,35.297 ; U3.43 27.296,35.297 ; 27.305,28.512 27.305,32.17 U3.42 29.249,32.17 29.591,32.512 C9.2 28.067,36.068 27.296,35.297 ; 27.368,28.512 U3.33
  Top Layer w1.016: C9.2 C10.1 C13.1 C14.1
  Top Layer w1.27: U2.4@36.449,48.364 U2.4@36.695,48.118
  Bottom Layer w1.016: v1(20.574,33.782) 22.139,35.347 v1(24.66,35.347)
DVDD: C6.2 C7.1 C8.1 U3.23 U3.45 U3.50 | length 30.1
  Top Layer w0.178: U3.50 24.451,32.064 24.705,31.81 26.483,31.81 ; U3.45 26.483,31.81 ; C7.1 34.126,16.242 34.022,16.346 32.452,16.346 32.348,16.45 C8.1 29.464,18.288 29.3,18.452 C6.2 27.432,21.844 25.264,24.012 U3.23 25.264,26.915 25.654,27.305 26.08,27.305 26.67,27.895 26.67,31.623 26.483,31.81
GND: C1.2 C2.2 C3.2 C4.2 C5.2 C6.1 C7.2 C8.2 C9.1 C10.2 C11.2 C12.2 C13.2 C14.2 C15.2 C16.2 C17.1 D1.1 J1.2 J2.5 J2.6 J2.7 J2.8 J2.9 J2.10 J2.11 J3.1 J3.3 J3.5 J3.7 J3.9 J3.11 J3.13 J3.15 J3.17 J3.19 J3.21 J3.23 J3.25 J3.27 J3.29 J3.31 J3.33 J3.35 J3.36 J4.2 J4.4 J4.6 J4.8 J4.10 J4.12 J4.14 J4.16 J4.18 J4.20 J4.22 J4.24 J4.26 J4.28 J4.30 J4.32 J4.34 J4.35 J4.36 SW1.1 SW1.2 SW2.3 SW2.4 U1.4 U2.1 U3.19 U3.57 | length 112.5
  Top Layer w0.178: C1.2 21.96,20.69 23.638,22.368 U3.19 23.638,28.512 U3.57
  Top Layer w0.254: J2.7 J2.5
  Top Layer w0.5: J2.11 J2.10 J2.9 J2.8 30.2,48.514 C3.2
  Top Layer w0.508: SW1.2 SW1.1 20.845,44.505 J2.7 ; U1.4 13.261,37.035 15.239,37.035 v1(15.252,37.022) ; C1.2 21.861,19.332 21.762,19.431 19.431,19.431 15.113,15.113 v1(15.113,11.811) 17.145,9.779 C5.2
  Top Layer w0.762: v1(12.446,2.413) 12.468,2.435 12.468,4.205 C2.2 ; v1(15.494,2.286) 15.507,2.299 15.507,4.014 C15.2 ; v1(18.61,2.31) 18.618,2.318 18.618,4.018 C17.1 ; v1(29.58,40.073) 29.585,40.067 29.585,37.925 C9.1 ; C6.1 31.233,21.763 32.72,21.763 v1(32.766,21.717) ; C10.2 32.624,37.935 32.624,39.99 v1(32.639,40.005) 32.639,42.164 33.147,42.672 34.094,42.672 34.149,42.617 U2.1 ; SW2.3 SW2.4 47.109,1.389 47.879,2.159 J4.36 ; C8.2 34.221,18.266 36.06,18.266 v1(36.081,18.245) ; C13.2 35.743,37.933 35.743,39.871 v1(35.757,39.884) v1@35.821,39.884 ; C7.2 v1(37.973,14.097) ; C14.2 v1(38.862,39.878) ; v1(39.878,27.051) 39.9,27.073 39.9,29.442 D1.1 ; J4.35@45.276,4.636 J4.35
  Top Layer w1.016: v1(10.71,29.633) C12.2 ; v1(10.795,23.368) 12.888,23.368 C11.2 ; v1(10.795,26.543) 12.906,26.543 C16.2 ; J2.11 21.151,48.511 21.151,48.294 21.151,47.834 21.151,47.815 21.147,47.811 21.147,46.798 22.131,45.814 J2.7 ; J2.6 27.154,45.931 28.194,46.971 28.194,47.821 28.194,48.307 28.194,48.474 J2.8 ; C4.2 v1(41.91,48.514)
GPIO0: J3.8 U3.2 | length 21.6
  Top Layer w0.178: J3.8 8.382,40.259 10.414,38.227 10.414,35.56 11.582,34.392 17.819,34.392 20.447,31.763 U3.2
GPIO1: J3.10 U3.3 | length 20.4
  Top Layer w0.178: J3.10 4.798,37.62 9.802,37.62 9.906,37.516 9.906,35.433 11.354,33.985 17.577,33.985 20.205,31.357 U3.3
GPIO2: J3.12 U3.4 | length 18.3
  Top Layer w0.178: J3.12 6.223,35.179 7.874,33.528 17.399,33.528 19.977,30.95 U3.4
GPIO3: J3.14 U3.5 | length 17.8
  Top Layer w0.178: J3.14 5.057,32.639 5.539,33.122 17.231,33.122 19.808,30.544 U3.5
GPIO4: J3.16 U3.6 | length 18.7
  Top Layer w0.178: J3.16 7.315,32.715 17.062,32.715 19.64,30.138 U3.6
GPIO5: J3.18 U3.7 | length 20.7
  Top Layer w0.178: J3.18 6.232,29.092 6.232,31.057 7.484,32.309 16.894,32.309 19.472,29.731 U3.7
GPIO6: J3.20 U3.8 | length 22.8
  Top Layer w0.178: J3.20 6.858,27.178 6.858,31.109 7.652,31.902 16.726,31.902 19.303,29.325 U3.8
GPIO7: J3.22 U3.9 | length 24.8
  Top Layer w0.178: J3.22 7.264,25.044 7.264,30.94 7.82,31.496 16.557,31.496 19.135,28.918 U3.9
GPIO8: J3.24 U3.11 | length 21.5
  Top Layer w0.178: J3.24 14.345,19.939 18.872,24.467 18.872,27.067 19.911,28.106 U3.11
GPIO9: J3.26 U3.12 | length 22.3
  Top Layer w0.178: J3.26 12.379,17.399 19.279,24.298 19.279,26.899 20.079,27.699 U3.12
GPIO10: J3.28 U3.13 | length 23.2
  Top Layer w0.178: J3.28 10.414,14.859 19.685,24.13 19.685,26.67 20.308,27.293 U3.13
GPIO11: J3.30 U3.14 | length 24.1
  Top Layer w0.178: J3.30 8.503,12.319 20.091,23.908 20.091,26.441 20.536,26.886 U3.14
GPIO12: J3.32 U3.15 | length 25.2
  Top Layer w0.178: J3.32 6.537,9.779 20.837,24.079 21.844,24.079 22.012,24.248 U3.15
GPIO13: J3.34 U3.16 | length 27.9
  Top Layer w0.178: J3.34 6.604,7.239 8.382,9.017 8.382,11.049 21.006,23.673 22.022,23.673 22.419,24.07 U3.16
GPIO14: J4.33 U3.17 | length 73.8
  Top Layer w0.178: U3.17 22.825,23.901 22.19,23.266 21.174,23.266 8.89,10.982 8.89,8.89 6.477,6.477 6.477,2.794 8.58,0.691 31.298,0.691 33.02,2.413 41.656,2.413 43.942,4.699 43.942,5.842 J4.33
GPIO15: J4.31 U3.18 | length 75.8
  Top Layer w0.178: U3.18 23.232,23.486 22.606,22.86 21.342,22.86 9.296,10.814 9.296,8.722 6.883,6.309 6.883,2.962 8.749,1.097 29.464,1.097 31.669,3.302 41.148,3.302 43.18,5.334 43.18,9.271 43.688,9.779 J4.31
GPIO16: J4.29 U3.27 | length 24.7
  Top Layer w0.178: U3.27 26.889,25.181 27.102,24.968 32.617,24.968 45.266,12.319 J4.29
GPIO17: J4.27 U3.28 | length 23
  Top Layer w0.178: U3.28 27.296,25.663 27.55,25.409 32.75,25.409 43.301,14.859 J4.27
GPIO18: J4.25 U3.29 | length 21.2
  Top Layer w0.178: U3.29 28.731,26.886 29.796,25.821 32.913,25.821 41.335,17.399 J4.25
GPIO19: J4.23 U3.30 | length 20.3
  Top Layer w0.178: U3.30 28.968,27.293 30.034,26.227 33.082,26.227 39.37,19.939 J4.23
GPIO20: J4.21 U3.31 | length 21.2
  Top Layer w0.178: U3.31 29.137,27.699 30.202,26.634 33.25,26.634 39.538,20.345 43.205,20.345 J4.21
GPIO21: J4.19 U3.32 | length 21.3
  Top Layer w0.178: U3.32 29.305,28.106 30.359,27.051 33.407,27.051 38.741,21.717 42.037,21.717 J4.19
GPIO22: J4.17 U3.34 | length 24.1
  Top Layer w0.178: U3.34 29.067,28.918 30.528,27.457 33.655,27.457 38.989,22.123 41.808,22.123 43.688,24.003 43.688,27.051 44.196,27.559 J4.17
GPIO23: J4.15 U3.35 | length 25.5
  Top Layer w0.178: U3.35 29.235,29.325 30.696,27.864 33.909,27.864 39.243,22.53 41.64,22.53 43.104,23.994 43.104,27.864 J4.15
GPIO24: J4.13 U3.36 | length 27.5
  Top Layer w0.178: U3.36 29.403,29.731 30.864,28.27 34.163,28.27 39.497,22.936 41.472,22.936 42.621,24.086 42.621,28.27 43.885,29.534 43.885,31.185 J4.13
GPIO25: R5.1 U3.37 | length 4.4
  Top Layer w0.178: U3.37 30.441,30.138 31.115,29.464 R5.1
GPIO26: J4.11 U3.38 | length 19.2
  Top Layer w0.178: U3.38 32.017,30.544 34.544,33.071 40.945,33.071 43.053,35.179 J4.11
GPIO27: J4.9 U3.39 | length 20.9
  Top Layer w0.178: U3.39 31.846,30.95 34.373,33.477 40.723,33.477 42.926,35.681 42.926,37.084 43.561,37.719 J4.9
GPIO28: J4.7 U3.40 | length 23.1
  Top Layer w0.178: U3.40 31.678,31.357 34.204,33.884 40.554,33.884 42.291,35.62 42.291,39.243 43.307,40.259 J4.7
GPIO29: J4.5 U3.41 | length 26.2
  Top Layer w0.178: U3.41 31.509,31.763 34.036,34.29 40.386,34.29 41.148,35.052 41.148,42.418 41.529,42.799 J4.5
NetC5_1: C5.1 R2.2 Y1.1 | length 13.5
  Top Layer w1.016: C5.1 28.575,9.779 29.21,10.414 Y1.1 29.21,16.383 28.262,17.331 R2.2
NetD1_2: D1.2 R5.2 | length 2.5
  Top Layer w0.178: R5.2 D1.2
NetR3_2: R3.2 U3.47 | length 5.8
  Top Layer w0.178: R3.2 24.044,37.17 25.488,35.726 25.54,35.674 25.54,35.598 25.526,35.133 25.526,35.056 25.578,35.004 25.67,34.912 U3.47
NetR4_2: R4.2 U3.46 | length 5.3
  Top Layer w0.178: U3.46 26.076,33.47 26.128,35.145 26.67,35.687 R4.2
QSPI_SCLK: U1.6 U3.52 | length 7.4
  Top Layer w0.178: U1.6 21.994,38.318 22.327,37.985 22.327,35.773 23.638,34.407 U3.52
QSPI_SD0: U1.5 U3.53 | length 5.8
  Top Layer w0.178: U1.5 21.649,37.048 21.753,36.944 21.753,35.852 21.753,35.778 23.232,34.239 U3.53
QSPI_SD1: U1.2 U3.55 | length 17.6
  Top Layer w0.178: U1.2 11.902,39.588 11.684,39.37 11.684,35.941 12.319,35.306 20.955,35.306 22.419,33.842 U3.55
QSPI_SD2: U1.3 U3.54 | length 13.1
  Top Layer w0.178: U1.3 16.927,38.318 18.161,37.084 18.161,36.068 18.288,35.941 20.955,35.941 22.825,34.071 U3.54
QSPI_SD3: U1.7 U3.51 | length 8.9
  Top Layer w0.178: U1.7 22.134,39.588 22.733,38.989 22.733,35.941 24.044,34.63 U3.51
QSPI_SS_N: R1.1 U1.1 U3.56 | length 26.3
  Top Layer w0.178: R1.1@10.287,44.736 R1.1 9.779,41.402 10.323,40.858 11.521,40.858 ; U1.1 11.521,40.858 ; U3.56 22.012,33.614 20.828,34.798 11.811,34.798 10.922,35.687 10.922,40.259 11.521,40.858
RUN: SW2.1 SW2.2 U3.26 | length 38.6
  Top Layer w0.178: U3.26 26.483,24.825 26.746,24.562 32.448,24.562 42.291,14.719 42.291,5.842 41.537,5.088 SW2.2 SW2.1
SWCLK: J1.1 U3.24 | length 48.7
  Top Layer w0.178: J1.1 22.606,4.826 23.114,5.334 31.623,5.334 33.67,7.381 40.628,7.381 40.732,7.486 40.732,15.129 32.162,23.698 26.441,23.698 25.67,24.47 U3.24
SWDIO: J1.3 U3.25 | length 43.5
  Top Layer w0.178: U3.25 26.076,24.638 26.559,24.155 32.28,24.155 41.138,15.297 41.138,7.079 41.034,6.975 34.153,6.975 30.734,3.556 J1.3
USB_BOOT: R1.2 SW1.3 SW1.4 | length 9.5
  Top Layer w0.508: R1.2@9.904,47.244 R1.2 9.779,47.962 10.077,48.26 12.185,48.26 SW1.4 SW1.3
USB_D+: J2.3 R3.1 | length 6.2
  Top Layer w0.381: R3.1 24.044,42.84 24.654,43.45 J2.3
USB_D-: J2.2 R4.1 | length 6.5
  Top Layer w0.381: J2.2 25.304,43.657 26.67,42.291 R4.1
VBUS: C3.1 J2.1 J4.1 J4.3 U2.3 | length 33.3
  Top Layer w0.381: J2.1 25.954,44.658 27.305,43.307 29.496,43.307 30.623,44.434
  Top Layer w0.762: C3.1 30.623,44.434 32.611,44.434 33.643,45.466 v1(34.29,45.466) 37.819,45.466 38.749,44.536 U2.3
  Bottom Layer w0.762: v1(34.29,45.466) 34.336,45.42 45.258,45.42 J4.3 J4.1
XIN: C1.1 U3.20 Y1.2 | length 16.1
  Top Layer w0.178: C1.1 23.76,20.712 24.044,20.996 U3.20
  Top Layer w0.508: Y1.2 Y1.2@19.812,13.691
  Top Layer w1.016: Y1.2 19.71,16.042 20.305,16.637 23.114,16.637 23.76,17.283 C1.1
XOUT: R2.1 U3.21 | length 7.5
  Top Layer w0.178: U3.21 24.451,22.666 26.251,20.866 R2.1
pads on no net: J2.4

## Polygon pours and split planes (outlines as drawn)
ADC_AVDD on Top Layer "ADC_AVDD_L01_P000" (solid, pour order 0): 0,50 50,50 50,0 0,0
GND on Bottom Layer "GND" (solid, pour order 1): 0,50 50,50 50,0 0,0

## Silkscreen, mask and mechanical layers (free items; w line width, h text height)
Top Overlay:
  text "BOOT" at 14.351,42.164 h1.02
  text "G0" at 6.858,39.624 h1.52
  text "28" at 40.894,39.37 h1.52
  text "G1" at 6.858,37.211 h1.52
  text "27" at 40.894,37.084 h1.52
  text "26" at 40.894,34.731 h1.52
  text "G2" at 6.731,34.544 h1.52
  text "G3" at 6.731,32.004 h1.52
  text "24" at 40.894,31.937 h1.52
  text "G4" at 6.731,29.464 h1.52
  text "G5" at 6.731,26.924 h1.52
  text "G6" at 6.731,24.384 h1.52
  text "G21" at 39.37,24.13 h1.52
  text "G7" at 6.731,21.844 h1.52
  text "G20" at 39.37,21.463 h1.52
  text "G8" at 6.604,19.177 h1.52
  text "G19" at 39.497,18.923 h1.52
  text "G9" at 6.731,16.637 h1.52
  text "G18" at 39.497,16.51 h1.52
  text "G10" at 6.731,14.097 h1.52
  text "G17" at 39.497,14.097 h1.52
  text "G11" at 6.731,11.557 h1.52
  text "G16" at 39.497,11.43 h1.52
  text "G12" at 6.731,9.144 h1.52
  text "G15" at 39.524,8.88 h1.52
  text "G13" at 6.604,6.604 h1.52
  text "Reset" at 33.655,6.604 h1.52
  text "TEST1" at 3.556,0.762 h1.52
Mechanical 1:
  the board outline again, w0.254

## Text inside footprints (layer, text, board x,y; h text height)
J2: Mechanical 1 "PCB EDGE" at 31.854,50.064 h0.3 r180
U1: Top Overlay "*" at 12.677,41.264 h1.27; Top 3D Body "*" at 14.34,40.274 h1.27
U3: Top Overlay "*" at 19.05,31.623 h1.27; Top 3D Body "*" at 21.339,31.738 h1.27